# Altium PCB 7688A转接板-V3.2.PcbDoc (part 2 of 2)
Units mm, origin at the board's own origin, x right, y up, seen from the top; angles counter-clockwise.
Board outline 53 x 34 mm, 2 copper layers (Top, Bottom), stack 1.981 mm thick; 6 components, 131 nets, 220 pads, 60 vias.
Unrouted connection lines stored in the file: 5.
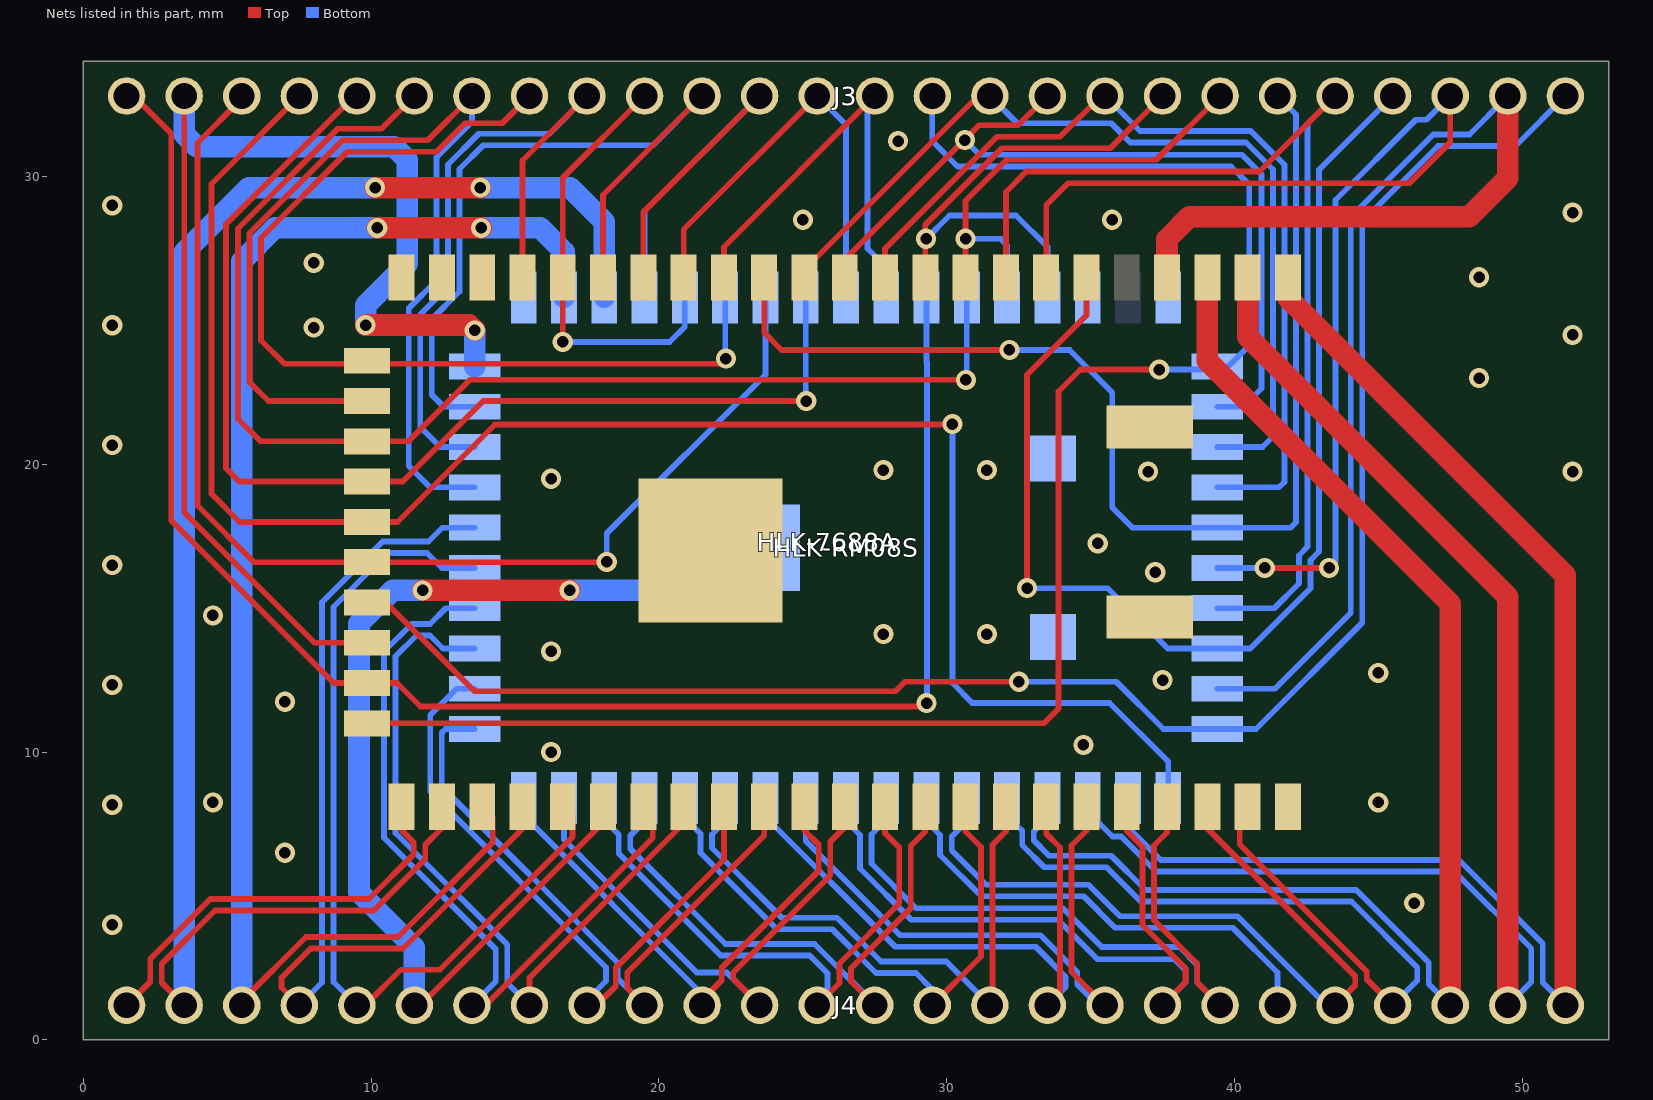
[diagram p2: the nets of this part, all layers, seen from the top]

## Via types
v1: diameter 0.7, hole 0.4, Top to Bottom, tented both sides, 59 vias
v2: diameter 0.7, hole 0.4, Top to Bottom, 1 vias

## Nets (pads, with @x,y where several pads share a name; then routed paths per layer and width w, separated by ;. In a path a pad name is that pad's centre, name@x,y a point inside that pad or via, vN(x,y) a via of type N, cw(c..) or ccw(c..) an arc to the next point about the centre after c; other vN are vias at no path point)
3.3VD: HLK-7688A.2 HLK-7688A.3 HLK-RM08S.39 HLK-RM08S.40 J4.24 J4.25 | length 142.1
  Top w0.75: v1(10.135,29.616) v1(13.792,29.616) ; v1(10.211,28.219) v1(13.818,28.219) ; HLK-7688A.3@39.057,26.499 39.057,23.605 47.5,15.162 J4.24@47.5,1.2 ; HLK-7688A.2@40.457,26.499 40.457,24.44 49.5,15.397 J4.25@49.5,1.2
  Bottom w0.75: J4.25@3.5,1.2 3.5,27.376 5.74,29.616 v1(10.135,29.616) ; J4.24@5.5,1.2 5.5,27.065 6.655,28.219 v1(10.211,28.219) ; v1(13.792,29.616) 16.916,29.616 18.1,28.433 HLK-RM08S.40@18.1,25.8 ; v1(13.818,28.219) 15.875,28.219 16.7,27.394 HLK-RM08S.39@16.7,25.8
$$$1: HLK-7688A.37 HLK-RM08S.15 J4.4 | length 31.5
  Top w0.2: J4.4@7.5,1.2 6.883,1.817 6.883,2.159 7.899,3.175 11.1,3.175 15.257,7.332 HLK-7688A.37@15.257,8.099
  Bottom w0.2: HLK-RM08S.15@32.1,8.4 32.1,7.8 32.621,7.278 32.621,6.77 33.392,6 35.551,6 36.742,4.809 44.064,4.809 46.356,2.516 46.356,2.056 J4.4@45.5,1.2
$$$2: HLK-7688A.36 HLK-RM08S.14 J4.3 | length 31.5
  Top w0.2: J4.3@5.5,1.2 5.5,1.341 7.734,3.575 10.934,3.575 14.224,6.865 14.224,7.732 HLK-7688A.36@13.857,8.099
  Bottom w0.2: HLK-RM08S.14@33.5,8.4 33.5,7.719 33.021,7.241 33.021,6.936 33.557,6.4 35.716,6.4 36.908,5.209 44.23,5.209 46.756,2.682 46.756,1.944 J4.3@47.5,1.2
AGND: HLK-7688A.57 HLK-7688A.58 HLK-7688A.59 HLK-RM08S.55 HLK-RM08S.56
  other v1: 1,4 46.25,4.75 7,6.5 1,8.167 4.5,8.25 45,8.25 16.25,10 34.75,10.25 7,11.75 1,12.333 37.5,12.5 45,12.75 16.25,13.5 27.8,14.1 31.4,14.1 4.5,14.75 37.25,16.25 1,16.5 35.25,17.25 16.25,19.5 37,19.75 51.75,19.75 27.8,19.8 31.4,19.8 1,20.667 48.5,23 51.75,24.5 8,24.75 1,24.833 48.5,26.5 8,27 25,28.5 35.75,28.5 51.75,28.75 1,29 28.308,31.234
ALARM_IN: HLK-7688A.13 HLK-RM08S.36 J3.16 | length 28.6
  Top w0.2: HLK-7688A.13@25.057,26.499 25.057,26.774 31.083,32.8 J3.16@31.5,32.8
  Bottom w0.2: HLK-RM08S.36@13.6,22 12.522,22 12.104,22.417 12.104,25.045 13.068,26.008 13.068,30.264 13.895,31.091 19.791,31.091 J3.16@21.5,32.8
ALARM_OUT: HLK-7688A.43 HLK-RM08S.21 J4.10 | length 23.8
  Top w0.2: J4.10@19.5,1.2 18.898,1.802 18.898,2.337 23.657,7.096 HLK-7688A.43@23.657,8.099
  Bottom w0.2: HLK-RM08S.21@23.7,8.4 23.7,7.748 28.214,3.234 33.091,3.234 34.139,2.186 34.139,1.839 J4.10@33.5,1.2
AMCLK: HLK-7688A.6 HLK-RM08S.48 J3.23 | length 25.9
  Top w0.2: 32.791,15.697 32.791,23.114 34.857,25.18 HLK-7688A.6@34.857,26.499
  Bottom w0.2: HLK-RM08S.48@29.3,25.8 29.3,23.546 29.312,23.534 29.312,11.612
ANT: HLK-7688A.22
CLK_N: 
CLK_P: 
CLKN: 
CLKP: 
CPURST_N: HLK-7688A.14 HLK-RM08S.49 J3.21 | length 13.6
  Top w0.2: HLK-7688A.14@23.657,26.499 23.657,24.578 24.257,23.978 v1(32.182,23.978)
  Bottom w0.2: 30.7,22.902 HLK-RM08S.49@30.7,25.8
DDR_BA0: 
DDR_BA1: 
DDR_BA2: 
DDR_CASN: 
DDR_CSN: 
DDR_IO_1V8_MT7688: 
DDR_MCKE: 
DDR_MDQM0: 
DDR_MDQM1: 
DDR_MDQS0: 
DDR_MDQS1: 
DDR_MODT: 
DDR_RASN: 
DDR_VREF: 
DDR_WEN: 
DEFKEY: HLK-7688A.16 HLK-RM08S.47 J3.13 | length 15.6
  Top w0.2: HLK-7688A.16@20.857,26.499 20.857,28.157 J3.13@25.5,32.8
  Bottom w0.2: J3.13@27.5,32.8 27.25,32.55 27.25,27.5 27.9,26.85 HLK-RM08S.47@27.9,25.8
GND: HLK-7688A.1 HLK-7688A.4 HLK-7688A.21 HLK-7688A.23 HLK-7688A.56 HLK-RM08S.37 HLK-RM08S.38 HLK-RM08S.52 HLK-RM08S.54 HLK-RM08S.57 J3.25 J4.21 J4.26 | length 96.1
  Top w0.75: v1(9.804,24.841) 13.411,24.841 v1(13.6,24.652) ; v1(11.786,15.621) v1(16.891,15.621) ; HLK-7688A.4@37.657,26.499 37.657,27.827 38.43,28.6 48.158,28.6 49.5,29.942 J3.25@49.5,32.8 ; HLK-7688A.1@41.857,26.499 41.857,25.783 51.5,16.14 J4.26@51.5,1.2
  Bottom w0.75: J3.25@3.5,32.8 3.5,31.476 3.937,31.039 10.795,31.039 11.252,30.582 11.252,26.975 9.804,25.527 v1(9.804,24.841) ; J4.21@11.5,1.2 11.5,3.207 9.576,5.131 9.576,14.453 10.744,15.621 v1(11.786,15.621) ; HLK-RM08S.37@13.6,23.4 v1(13.6,24.652) ; v1(16.891,15.621) 21.921,15.621 HLK-RM08S.57@23.4,17.1
HOLD: 
I2C_CLK: HLK-7688A.24 HLK-RM08S.51 J3.8 | length 38.2
  Top w0.2: J3.8@15.5,32.8 14.55,31.85 13.257,31.85 12.268,30.861 9.169,30.861 6.172,27.864 6.172,24.308 6.982,23.498 9.857,23.498 22.327,23.498 v1@22.355,23.498
  Bottom w0.2: 29.286,27.838 30.099,28.651 32.41,28.651 33.5,27.562 HLK-RM08S.51@33.5,25.8
  other v1: 22.327,23.673
I2C_DAT: HLK-7688A.25 HLK-RM08S.50 J3.7 | length 22.6
  Top w0.2: HLK-7688A.25@9.857,22.199 6.426,22.199 5.772,22.854 5.772,28.029 9.004,31.261 11.961,31.261 J3.7@13.5,32.8
  Bottom w0.2: 30.657,27.838 31.877,27.838 32.1,27.615 HLK-RM08S.50@32.1,25.8
I2S_CLK: HLK-7688A.20 HLK-RM08S.4 J3.9 | length 27.9
  Top w0.2: HLK-7688A.20@15.257,26.499 15.257,30.557 J3.9@17.5,32.8
  Bottom w0.2: J3.9@35.5,32.8 36.714,31.586 40.566,31.586 41.74,30.413 41.74,19.388 41.552,19.2 HLK-RM08S.4@39.4,19.2
I2S_SDI: HLK-7688A.17 HLK-RM08S.1 J3.12 | length 28.2
  Top w0.2: HLK-7688A.17@19.457,26.499 19.457,28.757 J3.12@23.5,32.8
  Bottom w0.2: J3.12@29.5,32.8 29.5,31.234 30.38,30.355 39.879,30.355 40.514,29.72 40.514,24.132 39.783,23.4 HLK-RM08S.1@39.4,23.4
I2S_SDO: HLK-7688A.18 HLK-RM08S.3 J3.11 | length 30
  Top w0.2: HLK-7688A.18@18.057,26.499 18.057,29.357 J3.11@21.5,32.8
  Bottom w0.2: J3.11@31.5,32.8 32.45,31.85 35.717,31.85 36.381,31.186 40.401,31.186 41.34,30.247 41.34,20.97 40.971,20.6 HLK-RM08S.3@39.4,20.6
I2S_WS: HLK-7688A.19 HLK-RM08S.2 J3.10 | length 29.8
  Top w0.2: v1(16.657,24.252) HLK-7688A.19@16.657,26.499 16.657,29.957 J3.10@19.5,32.8
  Bottom w0.2: v2(30.632,31.267) 31.139,30.761 40.26,30.761 40.94,30.081 40.94,22.633 40.307,22 HLK-RM08S.2@39.4,22
MADDR0: 
MADDR1: 
MADDR2: 
MADDR3: 
MADDR4: 
MADDR5: 
MADDR6: 
MADDR7: 
MADDR8: 
MADDR9: 
MADDR10: 
MADDR11: 
MADDR12: 
MADDR13: 
MDATA0: 
MDATA1: 
MDATA2: 
MDATA3: 
MDATA4: 
MDATA5: 
MDATA6: 
MDATA7: 
MDATA8: 
MDATA9: 
MDATA10: 
MDATA11: 
MDATA12: 
MDATA13: 
MDATA14: 
MDATA15: 
MOTO_D0: HLK-7688A.45 HLK-RM08S.23 J4.12 | length 21.6
  Top w0.2: J4.12@23.5,1.2 22.581,2.119 22.581,2.337 25.952,5.709 25.952,6.883 26.457,7.388 HLK-7688A.45@26.457,8.099
  Bottom w0.2: HLK-RM08S.23@20.9,8.4 20.9,7.71 21.445,7.164 21.445,6.498 24.1,3.843 26.023,3.843 27.547,2.319 28.932,2.319 29.5,1.751 J4.12@29.5,1.2
MOTO_D1: HLK-7688A.39 HLK-RM08S.17 J4.6 | length 26.5
  Top w0.2: J4.6@11.5,1.2 11.716,1.2 18.057,7.541 HLK-7688A.39@18.057,8.099
  Bottom w0.2: HLK-RM08S.17@29.3,8.4 29.3,7.584 29.77,7.114 29.77,6.421 31.205,4.986 34.761,4.986 35.853,3.894 39.942,3.894 41.5,2.337 J4.6@41.5,1.2
MOTO_D2: HLK-7688A.30 HLK-RM08S.11 J3.26 | length 43.2
  Top w0.2: HLK-7688A.30@9.857,15.199 10.505,15.199 13.589,12.116 28.216,12.116 28.546,12.446 v1(32.512,12.446) ; v1@32.512,12.344 v1@32.715,12.344
  Bottom w0.2: 30.2,21.4 30.2,12.4 30.891,11.709 35.662,11.709 37.7,9.671 HLK-RM08S.11@37.7,8.4
MOTO_D3: HLK-7688A.42 HLK-RM08S.20 J4.9 | length 23.6
  Top w0.2: J4.9@17.5,1.2 17.837,1.2 18.498,1.861 18.498,2.502 22.257,6.262 HLK-7688A.42@22.257,8.099
  Bottom w0.2: HLK-RM08S.20@25.1,8.4 25.1,6.914 28.38,3.634 33.257,3.634 34.539,2.352 34.539,1.924 35.263,1.2 J4.9@35.5,1.2
MOTO_D4: HLK-7688A.44 HLK-RM08S.22 J4.11 | length 22.6
  Top w0.2: J4.11@21.5,1.2 21.5,1.39 22.181,2.071 22.181,2.502 25.552,5.874 25.552,6.782 25.057,7.277 HLK-7688A.44@25.057,8.099
  Bottom w0.2: HLK-RM08S.22@22.3,8.4 22.3,7.594 21.845,7.139 21.845,6.663 24.265,4.243 26.189,4.243 27.713,2.719 29.981,2.719 J4.11@31.5,1.2
MOTO_D5: HLK-7688A.8 HLK-RM08S.45 J3.22 | length 19.4
  Top w0.2: HLK-7688A.8@32.057,26.499 32.057,29.466 32.766,30.175 40.875,30.175 J3.22@43.5,32.8
  Bottom w0.2: HLK-RM08S.45@25.1,25.8 25.1,22.22 25.121,22.2
MOTO_D6: HLK-7688A.38 HLK-RM08S.16 J4.5 | length 28.7
  Top w0.2: J4.5@9.5,1.2 9.792,1.2 11.03,2.438 12.388,2.438 16.993,7.043 16.993,7.764 HLK-7688A.38@16.657,8.099
  Bottom w0.2: HLK-RM08S.16@30.7,8.4 30.7,7.586 30.177,7.063 30.177,6.58 31.37,5.386 34.926,5.386 36.019,4.294 40.108,4.294 43.202,1.2 J4.5@43.5,1.2
MOTO_D7: HLK-7688A.41 HLK-RM08S.19 J4.8 | length 26.1
  Top w0.2: J4.8@15.5,1.2 15.5,2.158 20.857,7.515 HLK-7688A.41@20.857,8.099
  Bottom w0.2: HLK-RM08S.19@26.5,8.4 26.5,7.596 26.983,7.114 26.983,5.957 28.766,4.174 33.872,4.174 35.25,2.796 37.924,2.796 38.305,2.415 38.305,2.005 J4.8@37.5,1.2
MOTO_DOWN: HLK-7688A.12 HLK-RM08S.42 J3.17 | length 15.5
  Top w0.2: HLK-7688A.12@26.457,26.499 26.457,27.117 31.121,31.782 32.482,31.782 J3.17@33.5,32.8
  Bottom w0.2: 16.657,24.252 20.371,24.252 20.9,24.781 HLK-RM08S.42@20.9,25.8
MOTO_LEFT: HLK-7688A.10 HLK-RM08S.43 J3.19 | length 14.1
  Top w0.2: HLK-7688A.10@29.257,26.499 29.257,27.838 29.257,28.324 31.915,30.982 35.682,30.982 J3.19@37.5,32.8
  Bottom w0.2: HLK-RM08S.43@22.3,25.8 22.3,23.629 22.329,23.599
  other v1: 29.286,27.838
MOTO_RIGHT: HLK-7688A.11 HLK-RM08S.35 J3.18 | length 28.4
  Top w0.2: HLK-7688A.11@27.857,26.499 27.857,27.49 31.749,31.382 33.94,31.382 35.359,32.8 J3.18@35.5,32.8
  Bottom w0.2: HLK-RM08S.35@13.6,20.6 12.398,20.6 11.704,21.293 11.704,25.21 12.668,26.174 12.668,30.423 13.737,31.491 16.191,31.491 J3.18@17.5,32.8
MOTO_UP: HLK-7688A.9 HLK-RM08S.34 J3.20 | length 29.4
  Top w0.2: HLK-7688A.9@30.657,26.499 v1(30.657,27.838) 30.657,29.158 32.08,30.582 37.282,30.582 J3.20@39.5,32.8
  Bottom w0.2: J3.20@13.5,32.8 13.5,31.9 12.268,30.668 12.268,26.389 11.304,25.425 11.304,19.941 12.045,19.2 HLK-RM08S.34@13.6,19.2
N25649: 
N17083158: 
N17083162: 
N17083174: 
N17083274: 
N17083406: 
N17083412: 
N17415955: 
N17415957: 
N17416113: 
N17416117: 
N17416125: 
N17416142: 
N17416414: 
N17510965: HLK-7688A.50 HLK-RM08S.28 J4.17 | length 20.9
  Top w0.2: HLK-7688A.50@33.457,8.099 33.457,7.164 33.941,6.68 33.941,1.641 J4.17@33.5,1.2
  Bottom w0.2: HLK-RM08S.28@13.6,10.8 12.578,10.8 12.447,10.67 12.447,8.797 18.562,2.682 18.562,2.138 J4.17@19.5,1.2
N17522973: 
N17522975: 
N17544480: 
N18021801: 
N18021821: 
N18021884: 
PERST_N: HLK-7688A.7 HLK-RM08S.44 J3.24 | length 30.5
  Top w0.2: HLK-7688A.7@33.457,26.499 33.457,29.012 34.214,29.769 46.076,29.769 47.5,31.193 J3.24@47.5,32.8
  Bottom w0.2: 18.186,16.612 18.186,17.602 23.7,23.116 HLK-RM08S.44@23.7,25.8
RFOUT_G0_L: 
RXIN0: HLK-7688A.35 HLK-RM08S.13 J4.2 | length 34.7
  Top w0.2: J4.2@3.5,1.2 2.718,1.982 2.718,2.642 4.572,4.496 10.091,4.496 11.881,6.286 11.881,6.782 12.457,7.358 HLK-7688A.35@12.457,8.099
  Bottom w0.2: HLK-RM08S.13@34.9,8.4 34.9,7.927 35.765,7.063 36.063,7.063 37.275,5.85 47.639,5.85 50.319,3.17 50.319,2.019 J4.2@49.5,1.2
RXIP0: HLK-7688A.34 HLK-RM08S.12 J4.1 | length 34
  Top w0.2: J4.1@1.5,1.2 2.318,2.018 2.318,2.807 4.406,4.896 9.925,4.896 11.481,6.452 11.481,6.858 11.057,7.282 HLK-7688A.34@11.057,8.099
  Bottom w0.2: HLK-RM08S.12@36.3,8.4 36.3,7.391 37.441,6.25 47.804,6.25 50.719,3.335 50.719,1.981 J4.1@51.5,1.2
SD_CD: HLK-7688A.47 HLK-RM08S.25 J4.14 | length 20.7
  Top w0.2: J4.14@27.5,1.2 26.67,2.03 26.67,2.489 28.753,4.572 28.753,6.731 29.257,7.235 HLK-7688A.47@29.257,8.099
  Bottom w0.2: HLK-RM08S.25@18.1,8.4 18.1,7.64 18.601,7.139 18.601,6.472 22.144,2.929 25.243,2.929 25.859,2.313 25.859,1.559 J4.14@25.5,1.2
SD_CMD: HLK-7688A.51 HLK-RM08S.29 J4.18 | length 22.7
  Top w0.2: HLK-7688A.51@34.857,8.099 34.857,7.273 34.341,6.756 34.341,2.359 J4.18@35.5,1.2
  Bottom w0.2: HLK-RM08S.29@13.6,12.2 12.962,12.2 12.047,11.286 12.047,8.631 18.162,2.516 18.162,2.043 17.41,1.29 17.32,1.2 J4.18@17.5,1.2
SD_D0: HLK-7688A.49 HLK-RM08S.27 J4.16 | length 16.9
  Top w0.2: J4.16@31.5,1.2 31.591,1.291 31.591,6.782 32.057,7.248 HLK-7688A.49@32.057,8.099
  Bottom w0.2: HLK-RM08S.27@15.3,8.4 15.3,7.792 21.5,1.592 J4.16@21.5,1.2
SD_D1: HLK-7688A.48 HLK-RM08S.26 J4.15 | length 18.4
  Top w0.2: J4.15@29.5,1.2 31.191,2.891 31.191,6.706 30.657,7.24 HLK-7688A.48@30.657,8.099
  Bottom w0.2: HLK-RM08S.26@16.7,8.4 16.7,6.957 21.315,2.342 22.358,2.342 J4.15@23.5,1.2
SD_D2: HLK-7688A.53 HLK-RM08S.31 J4.20 | length 26.1
  Top w0.2: HLK-7688A.53@37.657,8.099 37.657,7.209 37.205,6.756 37.205,4.153 38.703,2.655 38.703,1.997 J4.20@39.5,1.2
  Bottom w0.2: J4.20@13.5,1.2 14.327,2.027 14.327,3.144 10.447,7.024 10.447,13.495 11.406,14.454 12.041,14.454 12.587,15 HLK-RM08S.31@13.6,15
SD_D3: HLK-7688A.52 HLK-RM08S.30 J4.19 | length 25.4
  Top w0.2: HLK-7688A.52@36.257,8.099 36.257,7.253 36.805,6.706 36.805,3.988 38.303,2.489 38.303,2.003 J4.19@37.5,1.2
  Bottom w0.2: HLK-RM08S.30@13.6,13.6 12.495,13.6 12.041,14.054 11.572,14.054 10.847,13.33 10.847,7.19 14.727,3.31 14.727,1.973 J4.19@15.5,1.2
SD_WP: HLK-7688A.46 HLK-RM08S.24 J4.13 | length 21
  Top w0.2: J4.13@25.5,1.2 26.27,1.97 26.27,2.655 28.353,4.738 28.353,6.68 27.857,7.176 HLK-7688A.46@27.857,8.099
  Bottom w0.2: HLK-RM08S.24@19.5,8.4 19.5,7.588 19.001,7.088 19.001,6.638 22.309,3.329 25.408,3.329 27.5,1.237 J4.13@27.5,1.2
SFLASH_CLK: HLK-7688A.27 HLK-RM08S.7 J3.5 | length 57.1
  Top w0.2: J3.5@9.5,32.8 9.407,32.8 4.953,28.346 4.953,19.863 5.416,19.399 HLK-7688A.27@9.857,19.399 11.094,19.399 13.894,22.2 v1(25.121,22.2)
  Bottom w0.2: HLK-RM08S.7@39.4,15 41.384,15 42.24,15.856 42.24,16.835 42.54,17.135 42.54,31.84 J3.5@43.5,32.8
SOC_1.2VD: 
SPI_CLK: 
SPI_CS0: 
SPI_CS1: HLK-7688A.26 HLK-RM08S.5 J3.6 | length 71.2
  Top w0.2: J3.6@11.5,32.8 10.361,31.661 8.838,31.661 5.372,28.195 5.372,21.577 6.15,20.799 HLK-7688A.26@9.857,20.799 11.3,20.799 13.437,22.936 v1(30.666,22.936)
  Bottom w0.2: 32.182,23.978 34.272,23.978 35.75,22.5 35.75,18.5 36.45,17.8 HLK-RM08S.5@39.4,17.8 41.955,17.8 42.14,17.985 42.14,32.16 J3.6@41.5,32.8
SPI_MISO: HLK-7688A.28 HLK-RM08S.8 J3.4 | length 72.5
  Top w0.2: J3.4@7.5,32.8 4.445,29.745 4.445,18.974 5.419,17.999 HLK-7688A.28@9.857,17.999 10.913,17.999 14.3,21.387 30.187,21.387
  Bottom w0.2: v1(32.791,15.697) 35.585,15.697 37.683,13.6 HLK-RM08S.8@39.4,13.6 40.549,13.6 42.64,15.691 42.64,16.669 42.94,16.969 42.94,30.24 J3.4@45.5,32.8
  other v1: 29.3,11.7
SPI_MOSI: HLK-7688A.29 HLK-RM08S.6 J3.3 | length 52.2
  Top w0.2: J3.3@5.5,32.8 5.5,32.703 3.962,31.166 3.962,18.567 5.93,16.599 HLK-7688A.29@9.857,16.599 18.174,16.599 v1(18.186,16.612) ; v1(41.055,16.4) v1(43.29,16.4)
  Bottom w0.2: HLK-RM08S.6@39.4,16.4 v1(41.055,16.4) ; v1(43.29,16.4) 43.51,16.62 43.51,29.185 46.304,31.979 46.679,31.979 J3.3@47.5,32.8
STATUSLED_AU: HLK-7688A.40 HLK-RM08S.18 J4.7 | length 26.9
  Top w0.2: J4.7@13.5,1.2 13.976,1.2 19.787,7.01 19.787,7.77 HLK-7688A.40@19.457,8.099
  Bottom w0.2: HLK-RM08S.18@27.9,8.4 27.9,7.656 27.383,7.139 27.383,6.123 28.932,4.574 34.037,4.574 35.39,3.221 38.089,3.221 38.705,2.606 38.705,1.995 J4.7@39.5,1.2
UART_RXD0: HLK-7688A.32 HLK-RM08S.10 J3.1 | length 81.5
  Top w0.2: J3.1@1.5,32.8 1.744,32.8 3.048,31.496 3.048,18.052 8.701,12.399 HLK-7688A.32@9.857,12.399 10.892,12.399 11.709,11.582 29.182,11.582 29.3,11.7
  Bottom w0.2: 32.512,12.446 35.89,12.446 37.536,10.8 HLK-RM08S.10@39.4,10.8 40.746,10.8 44.444,14.497 44.444,28.435 47.075,31.066 49.766,31.066 J3.1@51.5,32.8
  other v1: 30.2,21.4
UART_TXD0: HLK-7688A.31 HLK-RM08S.9 J3.2 | length 49.4
  Top w0.2: J3.2@3.5,32.8 3.5,18.325 8.026,13.799 HLK-7688A.31@9.857,13.799
  Bottom w0.2: HLK-RM08S.9@39.4,12.2 41.41,12.2 44.044,14.834 44.044,28.6 46.909,31.466 48.166,31.466 J3.2@49.5,32.8
UART_TXD1: HLK-7688A.15 HLK-RM08S.46 J3.14 | length 15.9
  Top w0.2: HLK-7688A.15@22.257,26.499 22.257,27.557 J3.14@27.5,32.8
  Bottom w0.2: J3.14@25.5,32.8 26.5,31.8 HLK-RM08S.46@26.5,25.8
USB_DN: HLK-7688A.55 HLK-RM08S.33 J4.23 | length 29.9
  Top w0.2: HLK-7688A.55@40.457,8.099 40.183,7.825 40.183,6.789 44.596,2.375 44.596,2.104 J4.23@45.5,1.2
  Bottom w0.2: J4.23@7.5,1.2 8.288,1.988 8.288,15.204 10.402,17.318 11.99,17.318 12.472,17.8 HLK-RM08S.33@13.6,17.8
USB_DP: HLK-7688A.54 HLK-RM08S.32 J4.22 | length 29.4
  Top w0.2: HLK-7688A.54@39.057,8.099 39.057,7.349 44.196,2.21 44.196,1.896 J4.22@43.5,1.2
  Bottom w0.2: J4.22@9.5,1.2 8.688,2.012 8.688,15.038 10.568,16.918 11.939,16.918 12.457,16.4 HLK-RM08S.32@13.6,16.4
WF0_IPA: 
WF1_2GPA_3V3_IN: 
WF1_IPA: 
WF_SX_3V3_IN: 
WLED_N: HLK-7688A.33 HLK-RM08S.41 J3.15 | length 49.6
  Top w0.2: HLK-7688A.33@9.857,10.999 33.377,10.999 33.884,11.506 33.884,22.53 34.646,23.292 v1(37.389,23.292)
  Bottom w0.2: HLK-RM08S.41@19.5,25.8 19.5,28.8 J3.15@23.5,32.8 ; v1(37.389,23.292) 39.292,23.292
WP: 
XIN: 
pads on no net: HLK-7688A.5 HLK-RM08S.53

## Polygon pours and split planes (outlines as drawn)
AGND on Top "Top Overlay-No Net" (solid, pour order 6): 0,0 53,0 53,34 0,34
GND on Mid-Layer 1 "Mid-Layer 1-GND" (solid, remove dead copper, pour order 4): -1.975,34.054 54.93,34.054 54.93,0.038 -1.975,0.038
AGND on Bottom "Top Overlay-No Net" (solid, pour order 5): 0,0 53,0 53,34 0,34

## Keep-outs
Keep-Out Layer:
  the board outline again, w0.127

## Silkscreen, mask and mechanical layers (free items; w line width, h text height)
Silkscreen Top:
  lines w0.1: 43.188,7.942 45,7.942 45,26.641 43.188,26.641 ; 45.4,21.5 49.7,21.5 49.7,12.4 45.5,12.4 ; 47.6,12.4 47.7,12.4 47.7,21.5
  lines w0.102: 0.488,0.184 0.488,2.196 52.499,2.196 52.499,0.184 0.488,0.184 ; 0.498,31.801 0.498,33.813 52.508,33.813 52.508,31.801 0.498,31.801
  lines w0.12: 10.414,3.556 15.748,3.556 ; 16.129,3.556 21.463,3.556 ; 21.844,3.556 26.924,3.556 ; 27.432,3.556 32.512,3.556 ; 33.02,3.556 38.1,3.556 ; 37.338,30.226 42.672,30.226
  text "POWER" at 38.354,30.607 h0.7
  text "52" at 2,30 h0.85 r90
  text "27" at 52,30 h0.85 r90
  text "GND" at 11.5,27.8 h0.7 r90
  text "ANT" at 12.9,27.8 h0.7 r90
  text "GND" at 14.3,27.8 h0.7 r90
  text "I2S_CLK" at 15.7,27.8 h0.7 r90
  text "I2S_WS" at 17.1,27.8 h0.7 r90
  text "I2S_DO" at 18.5,27.8 h0.7 r90
  text "I2S_DI" at 19.9,27.8 h0.7 r90
  text "RXD1" at 21.3,27.8 h0.7 r90
  text "TXD1" at 22.7,27.8 h0.7 r90
  text "PORST" at 24.1,27.8 h0.7 r90
  text "E_LED0" at 25.5,27.8 h0.7 r90
  text "E_LED1" at 26.9,27.8 h0.7 r90
  text "E_LED2" at 28.3,27.8 h0.7 r90
  text "E_LED3" at 29.7,27.8 h0.7 r90
  text "E_LED4" at 31.1,27.8 h0.7 r90
  text "WDTRST" at 32.5,27.8 h0.7 r90
  text "PERST" at 33.9,27.8 h0.7 r90
  text "RCLK0" at 35.3,27.8 h0.7 r90
  text "SPICS0" at 36.7,27.8 h0.7 r90
  text "GND" at 38.1,27.8 h0.7 r90
  text "3.3V" at 39.5,27.8 h0.7 r90
  text "3.3V" at 40.9,27.8 h0.7 r90
  text "GND" at 42.3,27.8 h0.7 r90
  text "23" at 10,27.1 h0.85 r90
  text "I2C_CLK" at 4.9,23.3 h0.7
  text "I2C_SD" at 5.45,21.9 h0.7
  text "SPI_CS1" at 5.127,20.5 h0.7
  text "SPI_CLK" at 4.973,19.1 h0.7
  text "SPI_MISO" at 4.577,17.7 h0.7
  text "SPI_MOSI" at 4.56,16.3 h0.7
  text "GPIO0" at 6.036,14.9 h0.7
  text "UART_TXD0" at 3.214,13.5 h0.7
  text "HLK-7628N" at 49.2,13 h1 r90
  text "UART_RXD0" at 3.14,12.1 h0.7
  text "WLED_N" at 5.083,10.7 h0.7
  text "34" at 10,6.2 h0.85 r90
  text "56" at 43.7,6.2 h0.85 r90
  text "HLK-7688A/7628N-KIT-V3.2" at 2.4,5.8 h1.1 r90
  text "GND" at 42.2,5.1 h0.7 r90
  text "P1_TP" at 17,4.11 h0.7 r90
  text "P1_TN" at 18.4,4.11 h0.7 r90
  text "P1_RP" at 19.8,4.037 h0.7 r90
  text "P1_RN" at 21.2,4.037 h0.7 r90
  text "P0_TP" at 14.2,4 h0.7 r90
  text "P0_TN" at 15.6,4 h0.7 r90
  text "P2_TP" at 25.4,4 h0.7 r90
  text "P2_TN" at 26.8,4 h0.7 r90
  text "P3_TP" at 28.2,4 h0.7 r90
  text "P3_TN" at 29.6,4 h0.7 r90
  text "P4_TP" at 36.6,4 h0.7 r90
  text "P4_TN" at 38,4 h0.7 r90
  text "P0_RP" at 11.4,3.927 h0.7 r90
  text "P0_RN" at 12.8,3.927 h0.7 r90
  text "P2_RP" at 22.6,3.927 h0.7 r90
  text "P2_RN" at 24,3.927 h0.7 r90
  text "P3_RP" at 31,3.927 h0.7 r90
  text "P3_RN" at 32.4,3.927 h0.7 r90
  text "P4_RP" at 33.8,3.927 h0.7 r90
  text "P4_RN" at 35.2,3.927 h0.7 r90
  text "USB_DP" at 39.4,3.267 h0.7 r90
  text "USB_DM" at 40.8,3.2 h0.7 r90
  text "1" at 2,2.75 h0.85 r90
  text "WAN" at 12.065,2.54 h0.7
  text "LAN1" at 17.78,2.54 h0.7
  text "LAN2" at 23.495,2.54 h0.7
  text "LAN3" at 29.083,2.54 h0.7
  text "LAN4" at 34.671,2.54 h0.7
  text "26" at 52,2.5 h0.85 r90
Silkscreen Bottom:
  lines w0.102: 0.492,31.801 52.502,31.801 52.502,33.813 0.492,33.813 0.492,31.801 ; 0.501,0.184 52.512,0.184 52.512,2.196 0.501,2.196 0.501,0.184
  lines w0.12: 8.636,10.033 8.636,15.367 ; 14.732,3.683 19.939,3.683 ; 20.447,3.683 25.527,3.683 ; 25.908,29.591 28.321,29.591 ; 26.035,3.683 31.242,3.683 ; 31.623,3.683 36.957,3.683 ; 46.863,10.287 46.863,12.573 ; 4.445,12.192 6.477,12.192 6.477,21.463 4.445,21.463 4.445,12.192
  text "27" at 1,30.1 h0.85 r270
  text "52" at 51.1,30.1 h0.85 r270
  text "UART1" at 28.448,29.972 h0.7
  text "GND" at 14.9,27.2 h0.7 r270
  text "3.3V" at 16.3,27.2 h0.7 r270
  text "3.3V" at 17.7,27.2 h0.7 r270
  text "WLED_N" at 19.1,27.2 h0.7 r270
  text "E_LED1" at 20.5,27.2 h0.7 r270
  text "E_LED3" at 21.9,27.2 h0.7 r270
  text "PERST_N" at 23.3,27.2 h0.7 r270
  text "WDT_RST" at 24.7,27.2 h0.7 r270
  text "TXD1" at 26.1,27.2 h0.7 r270
  text "RXD1" at 27.5,27.2 h0.7 r270
  text "REFCLK0" at 28.9,27.2 h0.7 r270
  text "PORST_N" at 30.3,27.2 h0.7 r270
  text "I2C_SD" at 31.7,27.2 h0.7 r270
  text "I2C_CLK" at 33.1,27.2 h0.7 r270
  text "GND" at 34.5,27.2 h0.7 r270
  text "ANT" at 35.9,27.2 h0.7 r270
  text "GND" at 37.3,27.2 h0.7 r270
  text "54" at 38.7,26.3 h0.85 r270
  text "38" at 13.4,26.2 h0.85 r270
  text "GND" at 12.1,23 h0.7
  text "I2S_DI" at 43.551,23 h0.7
  text "E_LED0" at 12.1,21.796 h0.7
  text "I2S_WS" at 44.2,21.6 h0.7
  text "E_LED2" at 12.1,20.359 h0.7
  text "I2S_DO" at 44.084,20.2 h0.7
  text "E_LED4" at 12.1,18.922 h0.7
  text "I2S_CLK" at 44.567,18.8 h0.7
  text "USB_DM" at 12.1,17.485 h0.7
  text "SPI_CS1" at 44.414,17.4 h0.7
  text "USB_DP" at 12.1,16.048 h0.7
  text "SPI_MOSI" at 44.98,16 h0.7
  text "P4_TN" at 12.1,14.611 h0.7
  text "SPI_CLK" at 44.567,14.6 h0.7
  text "SPI_MISO" at 44.964,13.2 h0.7
  text "P4_TP" at 12.1,13.174 h0.7
  text "UART_TXD0" at 46.327,11.8 h0.7
  text "P4_RN" at 12.1,11.737 h0.7
  text "LAN4" at 7.62,11.684 h0.7 r270
  text "UART_RXD0" at 46.4,10.4 h0.7
  text "P4_RP" at 12.1,10.3 h0.7
  text "UART0" at 47.244,10.033 h0.7 r270
  text "HLK-RM08S-KIT-V3.2" at 49.7,8.9 h1.2 r270
  text "11" at 38.7,7 h0.85 r270
  text "27" at 13.4,6.6 h0.85 r270
  text "GPIO0" at 37.3,4.4 h0.7 r270
  text "P1_TN" at 29.046,4.217 h0.7 r270
  text "P1_TP" at 30.46,4.217 h0.7 r270
  text "T0_TN" at 31.875,4.18 h0.7 r270
  text "P1_RN" at 26.217,4.143 h0.7 r270
  text "P1_RP" at 27.631,4.143 h0.7 r270
  text "P3_TN" at 17.729,4.107 h0.7 r270
  text "P3_TP" at 19.144,4.107 h0.7 r270
  text "P2_TN" at 20.558,4.107 h0.7 r270
  text "P2_TP" at 21.973,4.107 h0.7 r270
  text "P0_TP" at 33.29,4.107 h0.7 r270
  text "P3_RN" at 14.9,4.033 h0.7 r270
  text "P3_RP" at 16.315,4.033 h0.7 r270
  text "P2_RN" at 23.387,4.033 h0.7 r270
  text "P2_RP" at 24.802,4.033 h0.7 r270
  text "P0_RN" at 34.704,4.033 h0.7 r270
  text "P0_RP" at 36.119,4.033 h0.7 r270
  text "1" at 51,2.8 h0.85 r270
  text "26" at 1,2.7 h0.85 r270
  text "LAN3" at 18.288,2.667 h0.7
  text "LAN2" at 24.003,2.667 h0.7
  text "LAN1" at 29.591,2.667 h0.7
  text "WAN" at 35.306,2.667 h0.7